# EAGLE board electronic piano (EAGLE 6.5.0)
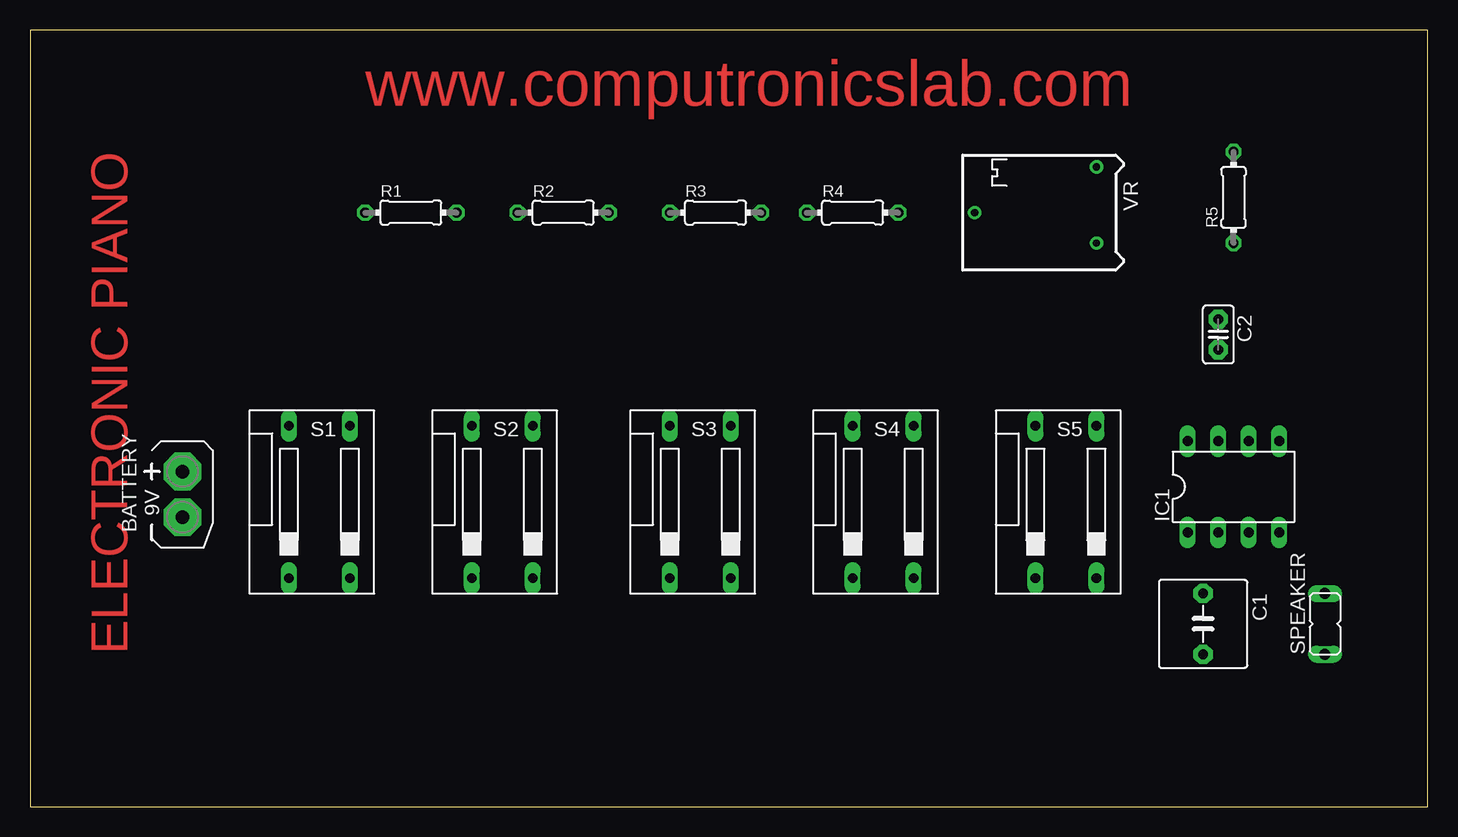
[diagram p0: board, top side]
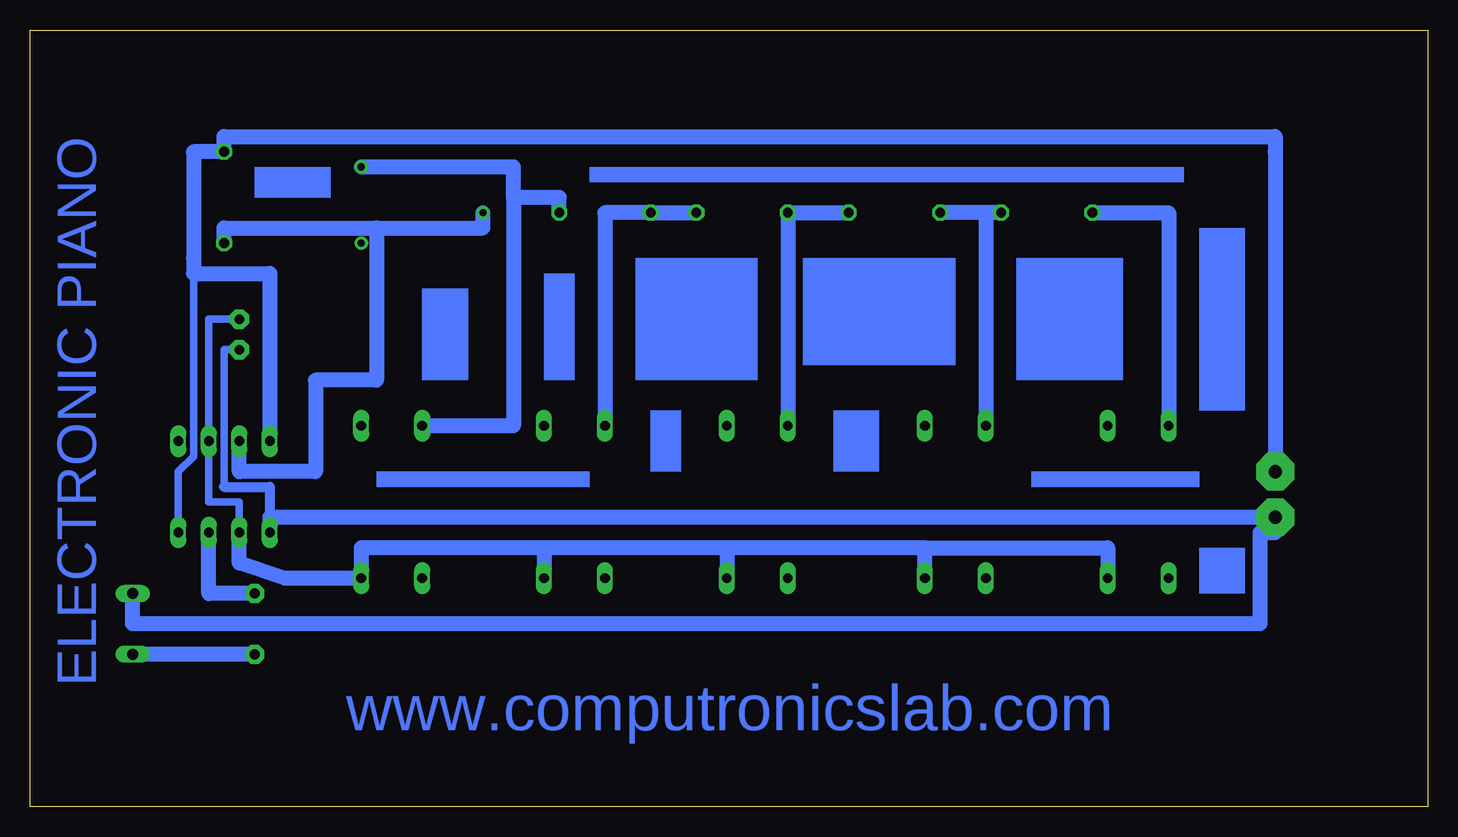
[diagram p1: board, bottom side, seen from below]

Size 116.51 x 64.76 mm. Coordinates in mm from the lower left corner, seen from the top.
Outline: 0,0 116.51,0 116.51,64.76 0,64.76 0,0
Copper layers (1*16): Top 0.035mm / dielectric 1.5mm / Bottom 0.035mm
Design rules "default": minimum track width 10mil, minimum drill 24mil, track to track 8mil, track to pad 8mil, pad to pad 8mil, via to via 8mil, smd to smd 8mil, copper to edge 40mil, drill to drill 8mil, minimum pad ring 10mil, minimum via ring 8mil, stop-mask expansion 4mil, vias tented up to drill 0mil, thermal gap 10mil

## Footprints (pad centres in the part's own frame; a part is rotated, then mirrored left to right if it is on the bottom)
AB9V = drill 1.118 pad 3.15 octagon: + 0,2.54; - 0,-1.27
C5B7.2 = drill 0.813 pad 1.6 octagon: 1 -2.54,0; 2 2.54,0
C2.5-2 = drill 0.813 pad 1.6 octagon: 1 -1.27,0; 2 1.27,0
DIL-08 = drill 0.813 long: 1 -3.81,-3.81; 2 -1.27,-3.81; 3 1.27,-3.81; 4 3.81,-3.81; 5 3.81,3.81; 6 1.27,3.81; 7 -1.27,3.81; 8 -3.81,3.81
0204/7 = drill 0.813 octagon: 1 -3.81,0; 2 3.81,0
DS-02 = drill 0.813 long: 1 -5.08,-6.35; 2 0,-6.35; 3 0,6.35; 4 -5.08,6.35
JP1 = drill 0.914 long: 1 0,-2.54; 2 0,2.54
RTRIM64P = drill 0.61: 1 -2.54,-3.81; 2 7.62,0; 3 -2.54,2.54

## Placement (x,y rotation side)
BATTERY  9V  [AB9V]  12.7,25.4 0 top
C1  10uf  [C5B7.2]  97.79,15.24 270 top
C2  0.1uf  [C2.5-2]  99.06,39.37 270 top
IC1  NE555  [DIL-08]  100.33,26.67 0 top
R1  1k  [0204/7]  31.75,49.53 0 top
R2  1k  [0204/7]  44.45,49.53 0 top
R3  1k  [0204/7]  57.15,49.53 0 top
R4  1k  [0204/7]  68.58,49.53 0 top
R5  4.7k  [0204/7]  100.33,50.8 90 top
S1  PUSH SWITCH  [DS-02]  26.67,25.4 0 top
S2  PUSH SWITCH  [DS-02]  41.91,25.4 0 top
S3  PUSH SWITCH  [DS-02]  58.42,25.4 0 top
S4  PUSH SWITCH  [DS-02]  73.66,25.4 0 top
S5  PUSH SWITCH  [DS-02]  88.9,25.4 0 top
SPEAKER  8 E  [JP1]  107.95,15.24 0 top
VR  10k  [RTRIM64P]  86.36,49.53 180 top

## Library data of the parts
BATTERY = battery
C1 C2 = capacitor-wima
IC1 = st-microelectronics; MF: Arrow Electronics; MPN: NE555N; OC_FARNELL: 1467742; OC_NEWARK: 89K1486
R1-R5 = eagle-ltspice; SPICEMODEL: NONE; SPICEPREFIX: R
S1-S5 = switch-dil; OC_FARNELL: 9472126; OC_NEWARK: unknown
SPEAKER = jumper
VR = resistor

## Nets
N$1: R1.1 S1.4
N$2: R1.2 R2.1 S2.4
N$3: R3.2 R4.1 S4.4
N$4: R4.2 S5.4 VR.1
N$5: R2.2 R3.1 S3.4
N$6: IC1.7 R5.1 VR.2
N$7: C2.1 IC1.2 IC1.6 S1.2 S2.2 S3.2 S4.2 S5.2
N$10: C1.1 IC1.3
N$11: BATTERY.+ IC1.4 IC1.8 R5.2
N$12: BATTERY.- C2.2 IC1.1 SPEAKER.2
N$13: C1.2 SPEAKER.1

## Tracks (layer width: path | path; a pad name or v marks a point on that pad's centre or on a via)
N$1
  Bottom 1.27: S1.4 21.59,49.53 R1.1
N$2
  Bottom 1.27: 36.83,49.53 S2.4 | R1.2 36.83,49.53 | 36.83,49.53 R2.1
N$3
  Bottom 1.27: S4.4 68.58,49.53 R4.1 R3.2
N$4
  Bottom 1.27: 76.2,50.8 72.39,50.8 R4.2 | 76.2,50.8 76.2,53.34 VR.1 | 76.2,50.8 76.2,31.75 S5.4
N$5
  Bottom 1.27: S3.4 R3.1 R2.2
N$6
  Bottom 1.27: VR.2 78.74,48.26 87.63,48.26 | 87.63,48.26 100.33,48.26 R5.1 | IC1.7 99.06,27.94 92.71,27.94 92.71,35.56 87.63,35.56 87.63,48.26
N$7
  Bottom 0.61: C2.1 101.6,40.64 IC1.6 101.6,25.4 99.06,25.4 IC1.2
  Bottom 1.27: S1.2 26.67,21.59 41.91,21.59 | S2.2 41.91,21.59 | 58.42,21.59 S3.2 | 41.91,21.59 58.42,21.59 | 73.66,21.59 S4.2 | 58.42,21.59 73.66,21.59 | 73.66,21.59 88.9,21.59 S5.2 95.25,19.05 99.06,20.32 IC1.2
N$10
  Bottom 1.27: IC1.3 101.6,17.78 C1.1
N$11
  Bottom 0.61: IC1.4 104.14,27.94 102.87,29.21 102.87,44.45
  Bottom 1.27: IC1.8 96.52,44.45 102.87,44.45 102.87,45.72 102.87,54.61 R5.2 100.33,55.88 12.7,55.88 12.7,54.61 BATTERY.+
N$12
  Bottom 0.61: C2.2 100.33,38.1 100.33,26.67
  Bottom 0.813: 100.33,26.67 96.52,26.67 IC1.1
  Bottom 1.27: SPEAKER.2 107.95,15.24 13.97,15.24 13.97,22.86 12.7,22.86 BATTERY.- 96.52,24.13 IC1.1
N$13
  Bottom 1.27: C1.2 SPEAKER.1
(copper drawn outside any net)
  shapes: Bottom area x13

## Text on the board
Top: www.computronicslab.com | ELECTRONIC PIANO
Bottom: ELECTRONIC PIANO | www.computronicslab.com